# Altium PCB mainPCB.PcbDoc
Units mil, origin at the board's own origin, x right, y up, seen from the top; angles counter-clockwise.
Board outline 2095 x 3365 mil, 4 copper layers (Top Layer, GND, 3V3, Bottom Layer), stack 23.756 mil thick; 52 components, 47 nets, 212 pads, 97 vias.
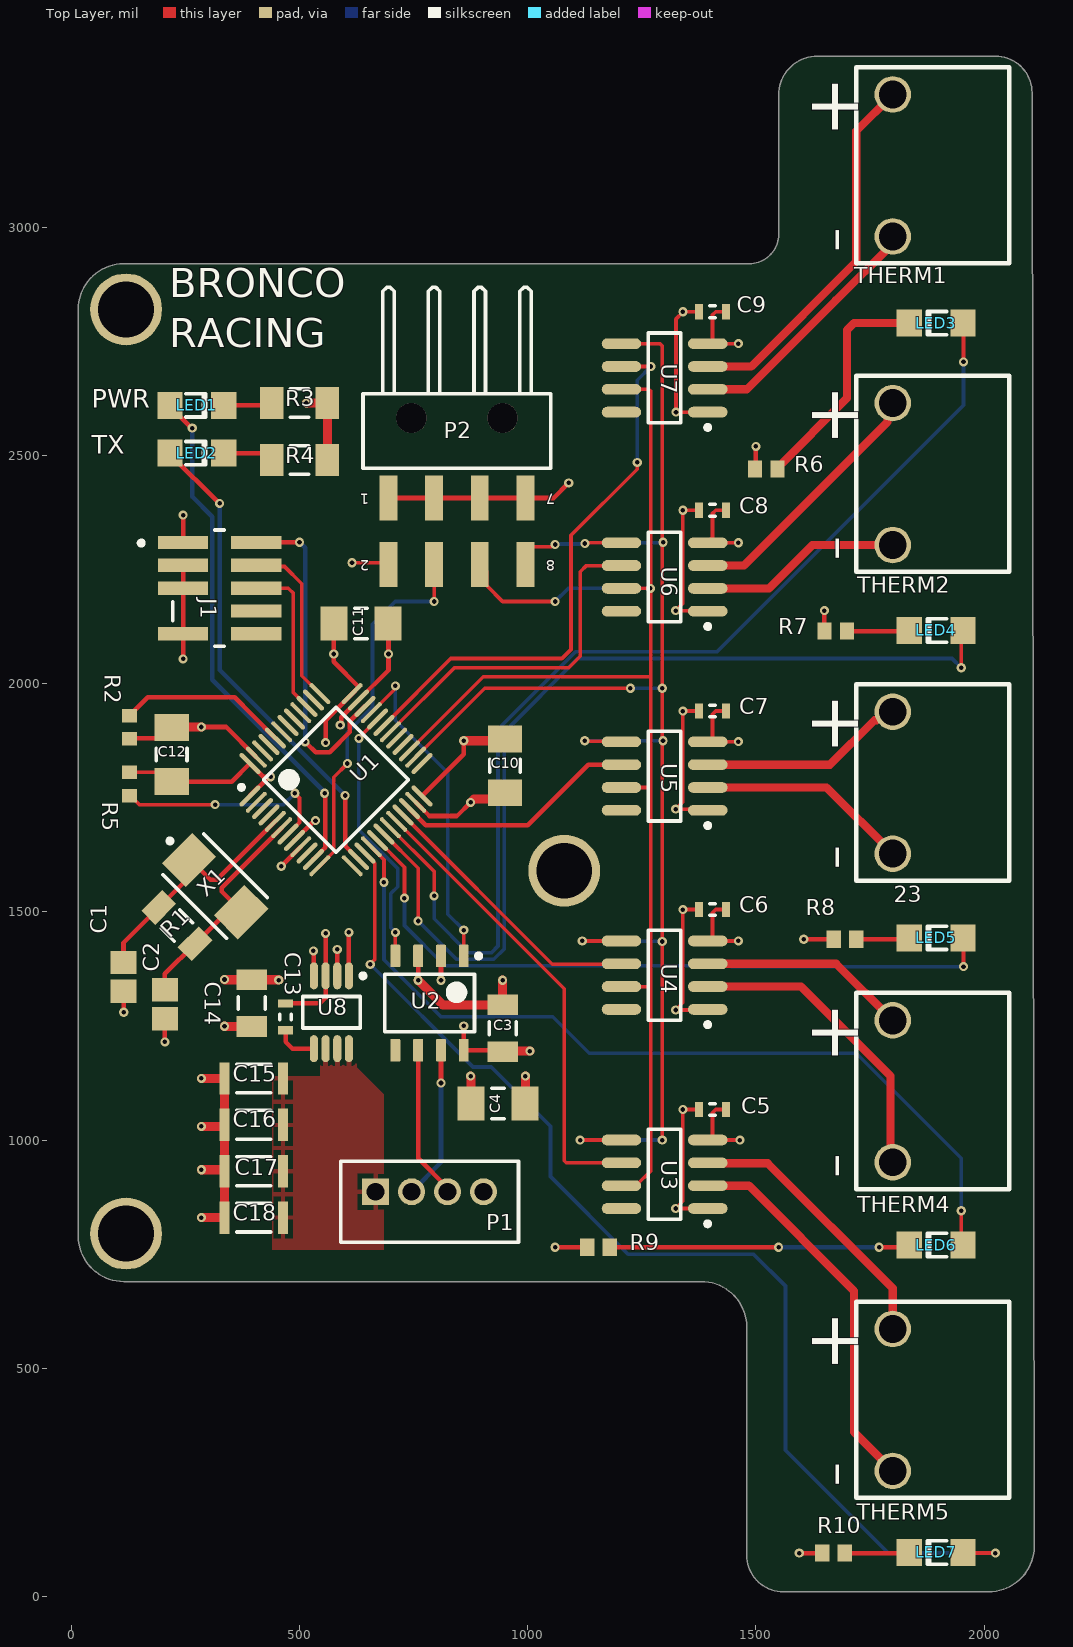
[diagram p0: Top Layer view]
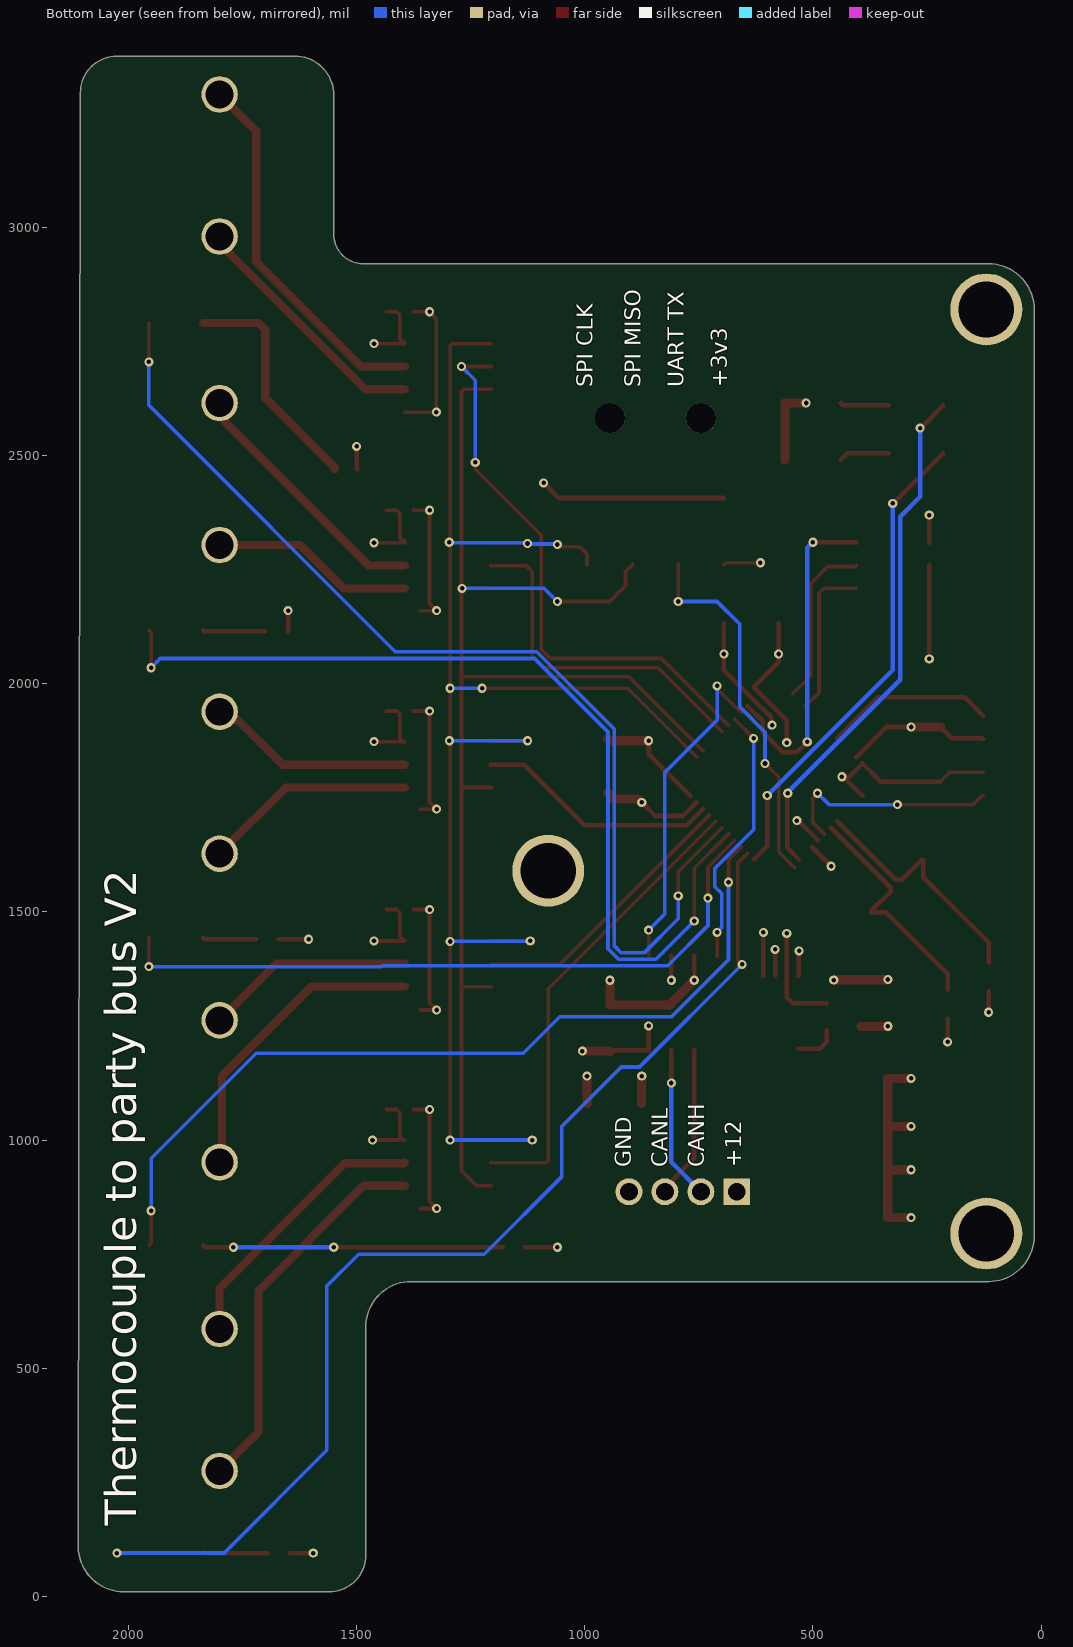
[diagram p1: Bottom Layer view, seen from below]
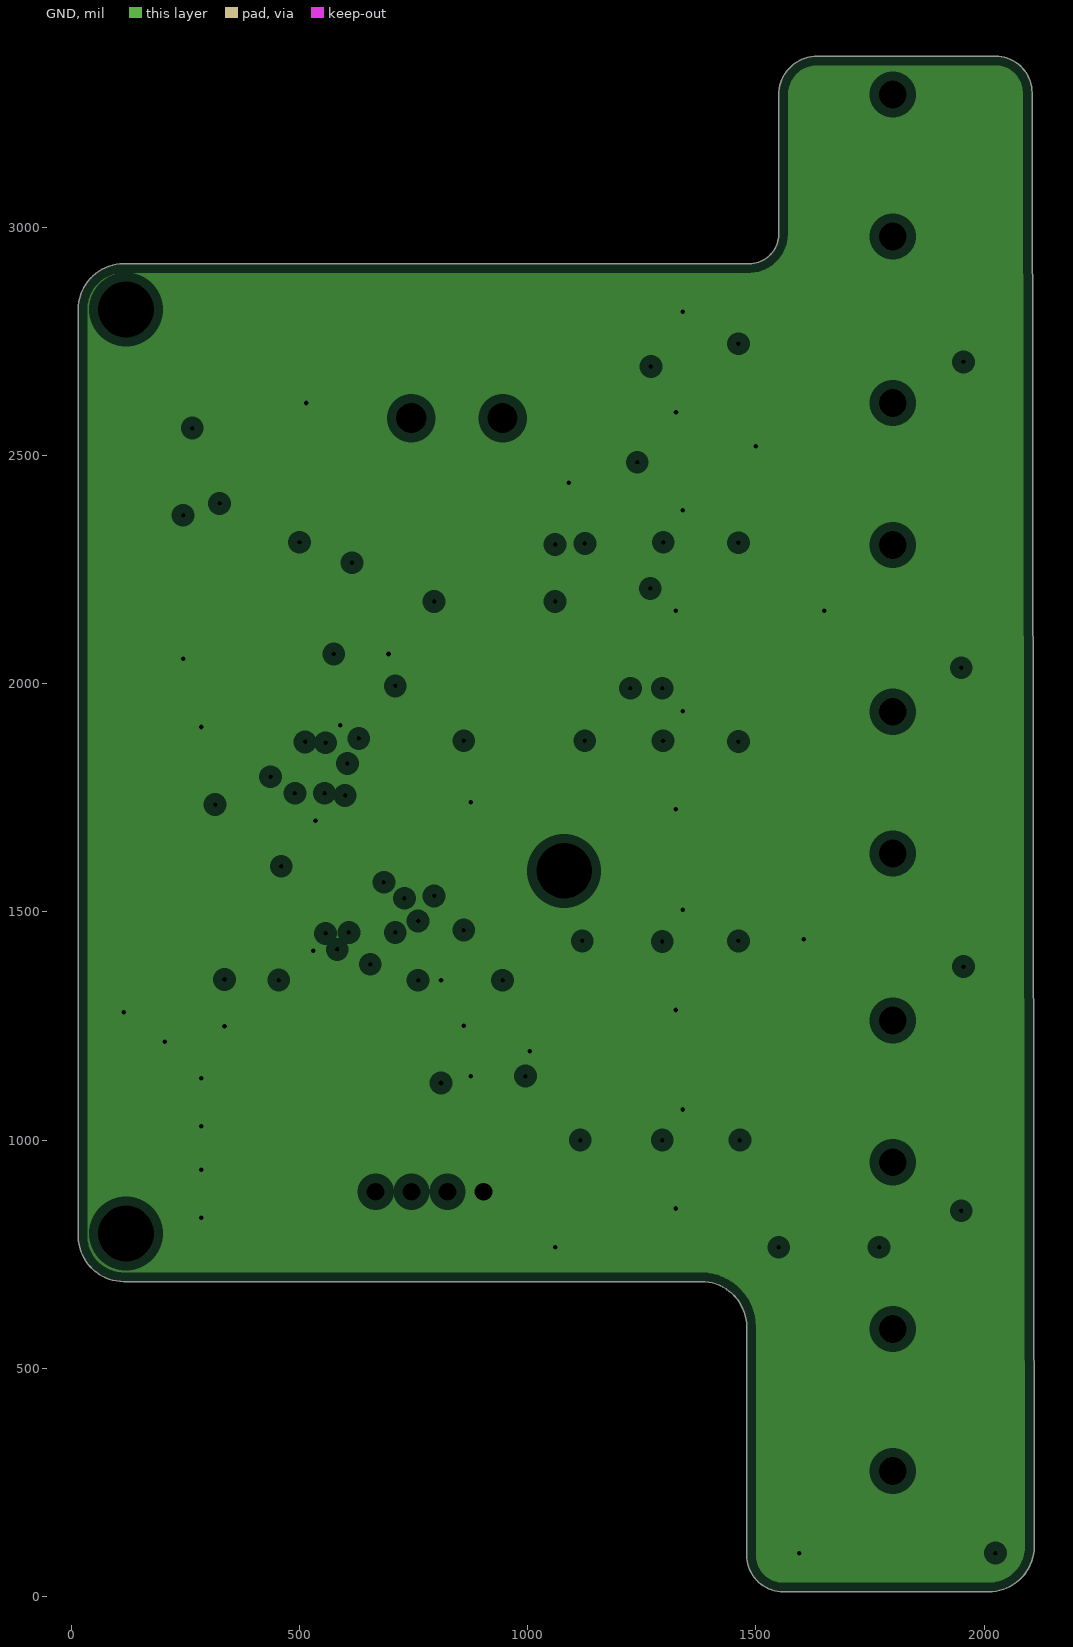
[diagram p2: GND, clearances drawn from the general rule]
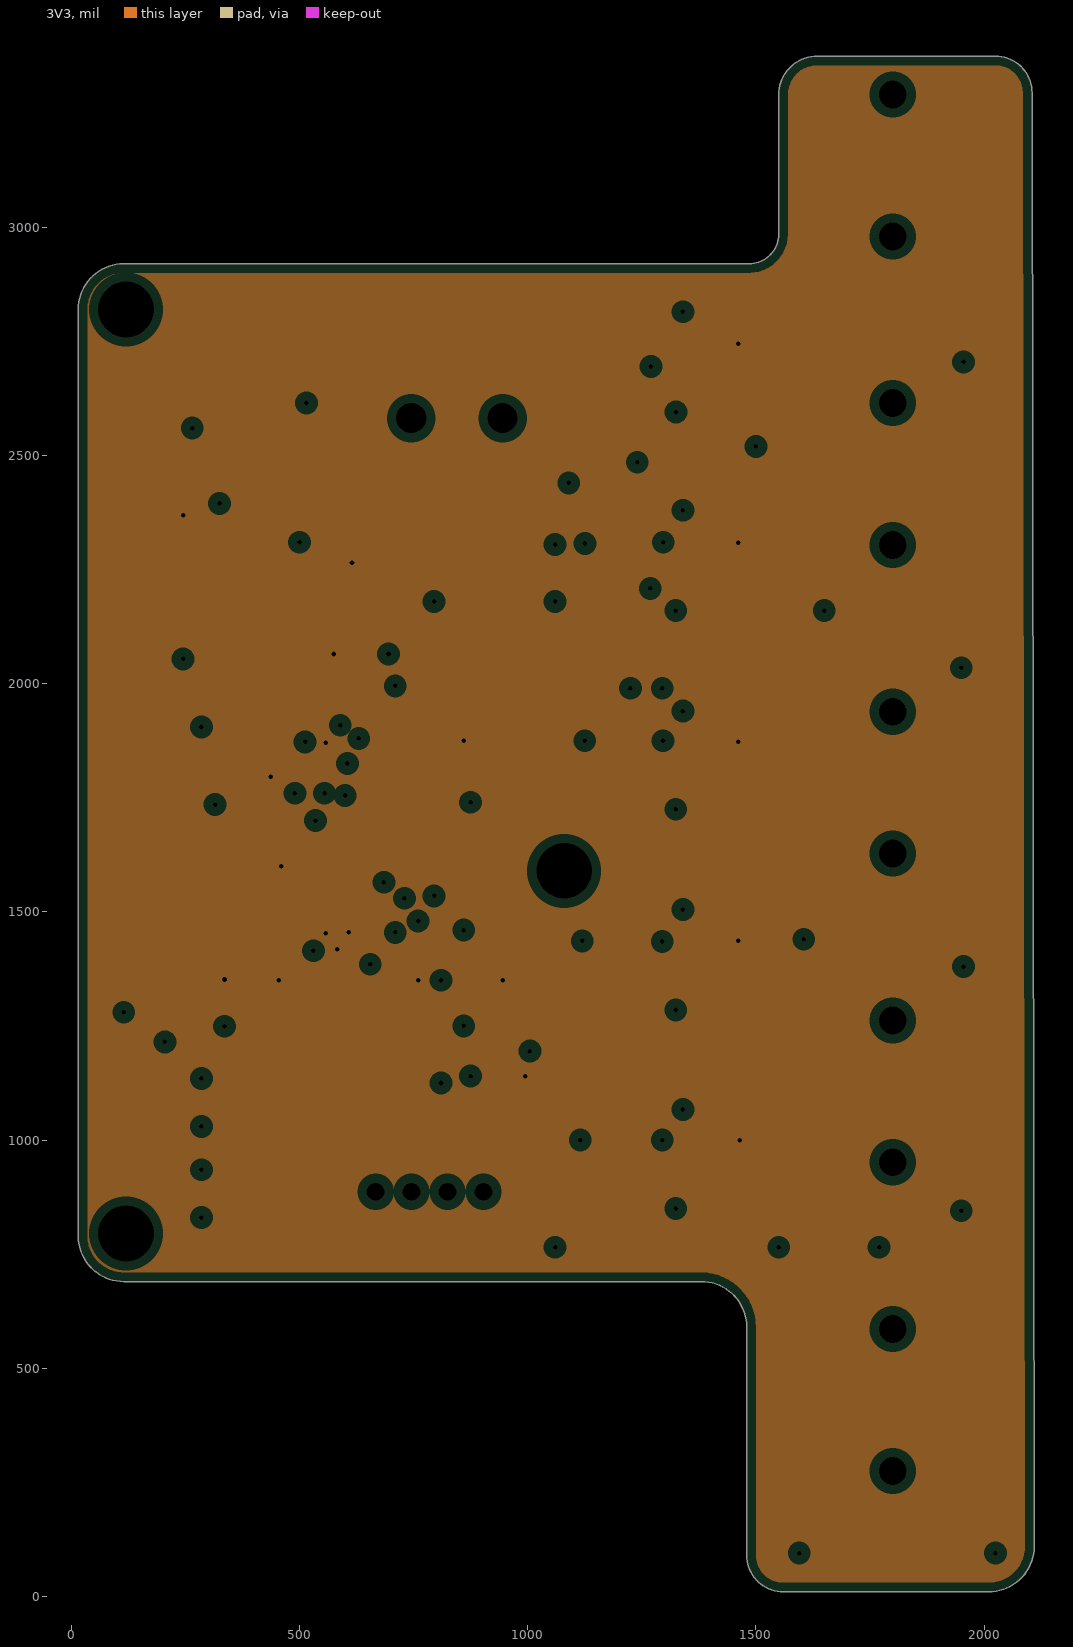
[diagram p3: 3V3, clearances drawn from the general rule]

## Layer stack, top to bottom
Top Solder: solder mask 0.4, Solder Resist, Dk 3.5
Top Layer: signal copper 1.4
Dielectric 2: prepreg 2.8, PP-006, Dk 4.1
GND: plane copper 1.378, net GND
Dielectric 1: dielectric 12.6, FR-4, Dk 4.8
3V3: plane copper 1.378, net 3V3
Dielectric 3: prepreg 2.8, PP-006, Dk 4.1
Bottom Layer: signal copper 1.4
Bottom Solder: solder mask 0.4, Solder Resist, Dk 3.5

## Board outline
1380,690 cw(c1380,590) 1480,590 1480,90 ccw(c1560,90) 1560,10 2010,10 ccw(c2010,110) 2110,110 2109.84,120 2105.12,3295 ccw(c2025.12,3295) 2025.12,3375 2000,3375 1635,3375 ccw(c1635,3290) 1550,3290 1550,2985 cw(c1485,2985) 1485,2920 1445,2920 115,2920 ccw(c115,2820) 15,2820 15,790 ccw(c115,790) 115,690

## Design rules (kind name [scope] priority, off if disabled: settings)
Clearance [All] p1: gap=10 ignorepadtopadclearanceinfootprint=TRUE except(0: SMDPad-Hole THPad-Hole Via-Hole Fill-Hole Poly-Hole Region-Hole Text-Hole; 6: Arc-Arc Arc-Track Arc-SMDPad Arc-THPad Arc-Via Arc-Fill Arc-Poly Arc-Region Arc-Text Arc-Hole Track-Track Track-SMDPad Track-THPad Track-Via Track-Fill Track-Poly Track-Region Track-Text Track-Hole)
PlaneClearance [All] p1: clearance=20
PlaneConnect [All] p1: planeconnectstyle=Relief reliefexpansion=20 reliefentries=4 reliefconductorwidth=10 reliefairgap=10
PolygonConnect [All] p1: connectstyle=Relief reliefconductorwidth=10 reliefentries=4 polygonreliefangle="90 Angle" airgapwidth=10
RoutingVias [All] p1: holewidth=10 width=20 viastyle="Through Hole" minholewidth=10 minwidth=20 maxholewidth=196.85 maxwidth=236.22
SilkToSilkClearance [All] p1 off: silktosilkclearance=10
SolderMaskExpansion [All] p1: expansion=4 istentingtop=FALSE
Width [All] p1: maxlimit=100 minlimit=6 preferedwidth=10 minimp=50.000000 maximp=50.000000 favimp=50.000000
27 further rules are at their usual default settings.

## Components (designator, comment, footprint, x,y, rotation, side; value= is the part's Value field where it differs from the comment)
23 "AM-K-PCB" "Type K Connector" 1800,1938.52 r270 top (schematic designator THERM3)
C1 "08051A200JAT2A" CAPC2013X140X50NL20T25 114.28,1357.42 r90 top
C2 "08051A200JAT2A" CAPC2013X140X50NL20T25 205,1297.42 r90 top
C3 "GRM31MR71H105KA88L" CAPC3216X125X55LL15T25 945,1245 r270 top
C4 "12065C104KAT2A" CAPC3216X94X50ML20T25 935,1080 r180 top
C5 "CGA3E2X7R1H104K080AA" CAPC1608X90X20LL10 1405,1066.9 r180 top
C6 "CGA3E2X7R1H104K080AA" CAPC1608X90X20LL10 1405,1505 r180 top
C7 "CGA3E2X7R1H104K080AA" CAPC1608X90X20LL10 1405,1940 r180 top
C8 "CGA3E2X7R1H104K080AA" CAPC1608X90X20LL10 1405,2380 r180 top
C9 "CGA3E2X7R1H104K080AA" CAPC1608X90X20LL10 1405,2815 r180 top
C10 "12065C104KAT2A" CAPC3216X94X50ML20T25 950,1820 r270 top
C11 "12065C104KAT2A" CAPC3216X94X50ML20T25 635,2131.82 r0 top
C12 "12065C104KAT2A" CAPC3216X94X50ML20T25 220,1845 r90 top
C13 "CGA3E2X7R1H104K080AA" CAPC1608X90X20LL10 469.44,1270 r270 top
C14 "GRM31MR71H105KA88L" CAPC3216X125X55LL15T25 395,1300 r270 top
C15 "CGA5L3X5R1H106K160AB" CAPC3216X190X20LL20 400,1135 r180 top
C16 "CGA5L3X5R1H106K160AB" CAPC3216X190X20LL20 400,830 r180 top
C17 "CGA5L3X5R1H106K160AB" CAPC3216X190X20LL20 400,1033.33 r180 top
C18 "CGA5L3X5R1H106K160AB" CAPC3216X190X20LL20 400,931.67 r180 top
J1 "FTSH-105-01-L-DV-007-K" FP-FTSH-105-01-L-DV-007-K-MFG 325,2209.18 r270 top
LED1 "150120GS75000" 1206_A 275,2610 r180 top
LED2 "150120GS75000" 1206_A 275,2505 r180 top
LED3 "150120GS75000" 1206_A 1895,2790 r0 top
LED4 "150120GS75000" 1206_A 1895,2116.6 r0 top
LED5 "150120GS75000" 1206_A 1895,1443.19 r0 top
LED6 "150120GS75000" 1206_A 1895,769.79 r0 top
LED7 "150120GS75000" 1206_A 1895,96.38 r0 top
P1 "B4B-PH-K-S(LF)(SN)" JST-B4B-PH-K-S_V 785,865 r0 top
P2 "610108249121" 610108249121 845,2553.28 r180 top
R1 "ERJ-8ENF1004V" RESC3216X70X50NL05T20 231.53,1470 r315 top
R2 "ERJ3EKF1002V" RESC1609X55X30LL15T15 127.31,1904.41 r270 top
R3 "CRCW1206200RFKEA" RESC3216X60X45ML10T20 500,2615 r180 top
R4 "CRCW1206200RFKEA" RESC3216X60X45ML10T20 500,2490 r180 top
R5 "ERJ3EKF1002V" RESC1609X55X30LL15T15 127.31,1780 r90 top
R6 "CRCW0603200RFKEA" RESC1609X50X30NL10T20 1522.82,2470 r180 top
R7 "CRCW0603200RFKEA" RESC1609X50X30NL10T20 1675,2115 r180 top
R8 "CRCW0603200RFKEA" RESC1609X50X30NL10T20 1695,1440 r180 top
R9 "CRCW0603200RFKEA" RESC1609X50X30NL10T20 1155,765 r180 top
R10 "CRCW0603200RFKEA" RESC1609X50X30NL10T20 1670,95 r180 top
THERM1 "AM-K-PCB" "Type K Connector" 1800,3291.02 r270 top
THERM2 "AM-K-PCB" "Type K Connector" 1800,2614.77 r270 top
THERM4 "AM-K-PCB" "Type K Connector" 1800,1262.27 r270 top
THERM5 "AM-K-PCB" "Type K Connector" 1800,586.02 r270 top
U1 "STM32F103C8T6" STM-LQFP48_L 580,1789.53 r45 top
U2 "SN65HVD230DR" D0008A_L 785,1300 r270 top
U3 "MAX31855KASA+T" MAXM-S8+4_N 1300,925 r180 top
U4 "MAX31855KASA+T" MAXM-S8+4_N 1300,1361.25 r180 top
U5 "MAX31855KASA+T" MAXM-S8+4_N 1300,1797.5 r180 top
U6 "MAX31855KASA+T" MAXM-S8+4_N 1300,2233.75 r180 top
U7 "MAX31855KASA+T" MAXM-S8+4_N 1300,2670 r180 top
U8 "ADP3335ARMZ-3.3RL7" ADI-RM-8_L 570,1280 r270 top
X1 "ABM3-8.000MHZ-D2Y-T" ABRA-ABM3-2_V 315,1556.5 r315 top

## Footprints (in the part's own frame and the unit in brackets; to place one, negate y for a bottom-side part, rotate by r counter-clockwise, add the part's x,y. Pads: shape width x height; smd on the part's side, far side on the other; paste and mask are expansions set on the pad)
1206_A [mm] "Chip LED, 2-Leads, Body 3.2x1.6mm, IPC Medium Density"
  rect 1.4x1.5 smd: 1(-1.5,0) 2(1.5,0)
  silkscreen extent -0.5,-0.67 0.6,0.65, body extent -1.6,-0.8 1.6,0.8, height 0.68
610108249121 [mm] "Pin Header, pitch 2.54 mm, SMD, Angled, dual row, 8p"
  rect 1x2.5 smd: 1(3.81,3.72) 2(3.81,7.42) 3(1.27,3.72) 4(1.27,7.42) 5(-1.27,3.72) 6(-1.27,7.42) 7(-3.81,3.72) 8(-3.81,7.42)
  round 1.68 hole 1.68 unplated: MH1(2.54,-0.73) MH2(-2.54,-0.73)
  silkscreen extent -5.23,-8 5.23,2.07, body extent -5.08,-8 5.08,8.16, height 5.1
ABRA-ABM3-2_V [mm] "SMD, 2-Leads, Body 5x3.2mm, Pitch 4.1mm"
  rect 1.9x2.4 smd: 1(-2.05,0) 2(2.05,0)
  silkscreen extent -3.67,-1.6 2.5,1.6, body extent -2.5,-1.6 2.5,1.6, height 1.3
ADI-RM-8_L [mm] "SOP, 8-Leads, Body 3x3mm, Pitch 0.65mm, IPC High Density"
  oval 1.5x0.45 smd: 1(-2.025,0.975) 2(-2.025,0.325) 3(-2.025,-0.325) 4(-2.025,-0.975) 5(2.025,-0.975) 6(2.025,-0.325) 7(2.025,0.325) 8(2.025,0.975)
  silkscreen extent -2.15,-1.6 0.87,1.88, body extent -1.6,-1.6 1.6,1.6, height 1.1
CAPC1608X90X20LL10 [mm] "Chip Capacitor, 2-Leads, Body 1.70x0.90mm, IPC High Density"
  rect 0.45x0.85 smd: 1(-0.75,0) 2(0.75,0)
  silkscreen extent -0.15,-0.33 0.15,0.33, body extent -0.85,-0.45 0.85,0.45, height 0.9
CAPC2013X140X50NL20T25 [mm] "Chip Capacitor, 2-Leads, Body 2.00x1.25mm, IPC Medium Density"
  rect 1.3x1.45 smd: 1(-0.8,0) 2(0.8,0)
  body extent -1.1,-0.72 1.1,0.72, height 1.4
CAPC3216X94X50ML20T25 [mm] "Chip Capacitor, 2-Leads, Body 3.20x1.60mm, IPC Low Density"
  rect 1.5x1.9 smd: 1(-1.5,0) 2(1.5,0)
  silkscreen extent -0.35,-0.85 0.35,0.85, body extent -1.7,-0.9 1.7,0.9, height 0.94
CAPC3216X125X55LL15T25 [mm] "Chip Capacitor, 2-Leads, Body 3.20x1.60mm, IPC High Density"
  rect 1.15x1.7 smd: 1(-1.3,0) 2(1.3,0)
  silkscreen extent -0.35,-0.75 0.35,0.75, body extent -1.68,-0.87 1.68,0.88, height 1.25
CAPC3216X190X20LL20 [mm] "Chip Capacitor, 2-Leads, Body 3.5x1.9mm, IPC High Density"
  rect 0.55x1.8 smd: 1(-1.625,0) 2(1.625,0)
  silkscreen extent -0.95,-0.8 0.95,0.8, body extent -1.75,-0.95 1.75,0.95, height 1.9
D0008A_L [mm] "SOIC, 8-Leads, Body 5x4mm, Pitch 1.27mm, IPC High Density"
  rrect18% 1.25x0.55 smd: 1(-2.625,1.905) 2(-2.625,0.635) 3(-2.625,-0.635) 4(-2.625,-1.905) 5(2.625,-1.905) 6(2.625,-0.635) 7(2.625,0.635) 8(2.625,1.905)
  silkscreen extent -2.75,-2.5 1.6,2.86, body extent -3,-2.45 3,2.45, height 1.63
FP-FTSH-105-01-L-DV-007-K-MFG [mm]
  rect 0.74x2.79 smd paste+0 mask+0: 1(-2.54,-2.035) 2(-2.54,2.035) 3(-1.27,-2.035) 4(-1.27,2.035) 5(0,-2.035) 6(0,2.035) 8(1.27,2.035) 9(2.54,-2.035) 10(2.54,2.035)
  silkscreen extent -3.24,-4.49 3.24,0.27, body extent -3.34,-3.53 3.34,3.53, height 0.25
JST-B4B-PH-K-S_V [mm] "Connector, 4-Leads, Body 9.9x4.5mm, Pitch 2mm"
  rect 1.5x1.5 hole 1: 1(-3,0.55)
  round 1.5 hole 1: 2(-1,0.55) 3(1,0.55) 4(3,0.55)
  silkscreen extent -4.95,-2.25 4.95,2.25, body extent -4.95,-2.25 4.95,2.25, height 6
MAXM-S8+4_N [mm] "SOIC, 8-Leads, Body 4.9x3.9mm, Pitch 1.27mm, IPC Medium Density"
  oval 2.2x0.6 smd: 1(-2.4,1.905) 2(-2.4,0.635) 3(-2.4,-0.635) 4(-2.4,-1.905) 5(2.4,-1.905) 6(2.4,-0.635) 7(2.4,0.635) 8(2.4,1.905)
  silkscreen extent -2.53,-2.5 0.9,2.88, body extent -2,-2.5 2,2.5, height 1.75
RESC1609X50X30NL10T20 [mm] "Chip Resistor, 2-Leads, Body 1.55x0.85mm, IPC Medium Density"
  rect 0.8x0.95 smd: 1(-0.625,0) 2(0.625,0)
  body extent -0.82,-0.48 0.82,0.48, height 0.5
RESC1609X55X30LL15T15 [mm] "Chip Resistor, 2-Leads, Body 1.75x0.95mm, IPC High Density"
  rect 0.75x0.85 smd: 1(-0.65,0) 2(0.65,0)
  body extent -0.87,-0.48 0.87,0.48, height 0.55
RESC3216X60X45ML10T20 [mm] "Chip Resistor, 2-Leads, Body 3.20x1.60mm, IPC Low Density"
  rect 1.3x1.8 smd: 1(-1.55,0) 2(1.55,0)
  silkscreen extent -0.5,-0.8 0.5,0.8, body extent -1.65,-0.85 1.65,0.85, height 0.6
RESC3216X70X50NL05T20 [mm] "Chip Resistor, 2-Leads, Body 3.20x1.60mm, IPC Medium Density"
  rect 1.1x1.65 smd: 1(-1.425,0) 2(1.425,0)
  silkscreen extent -0.5,-0.73 0.5,0.73, body extent -1.63,-0.82 1.62,0.82, height 0.7
STM-LQFP48_L [mm] "QFP, 48-Leads, Body 7x7mm, Pitch 0.5mm, IPC High Density"
  oval 1.55x0.25 smd: 1(-4.025,2.75) 2(-4.025,2.25) 3(-4.025,1.75) 4(-4.025,1.25) 5(-4.025,0.75) 6(-4.025,0.25) 7(-4.025,-0.25) 8(-4.025,-0.75) 9(-4.025,-1.25) 10(-4.025,-1.75) 11(-4.025,-2.25) 12(-4.025,-2.75) 25(4.025,-2.75) 26(4.025,-2.25) 27(4.025,-1.75) 28(4.025,-1.25) 29(4.025,-0.75) 30(4.025,-0.25) 31(4.025,0.25) 32(4.025,0.75) 33(4.025,1.25) 34(4.025,1.75) 35(4.025,2.25) 36(4.025,2.75)
  oval 0.25x1.55 smd: 13(-2.75,-4.025) 14(-2.25,-4.025) 15(-1.75,-4.025) 16(-1.25,-4.025) 17(-0.75,-4.025) 18(-0.25,-4.025) 19(0.25,-4.025) 20(0.75,-4.025) 21(1.25,-4.025) 22(1.75,-4.025) 23(2.25,-4.025) 24(2.75,-4.025) 37(2.75,4.025) 38(2.25,4.025) 39(1.75,4.025) 40(1.25,4.025) 41(0.75,4.025) 42(0.25,4.025) 43(-0.25,4.025) 44(-0.75,4.025) 45(-1.25,4.025) 46(-1.75,4.025) 47(-2.25,4.025) 48(-2.75,4.025)
  silkscreen extent -4.15,-2.85 2.85,3.55, body extent -3.5,-3.5 3.5,3.5, height 1.6
"Type K Connector" [mil]
  round 80 hole 61.02: 1(0,0) 2(311.02,0)
  silkscreen extent -60,-80 370,255

## Part data
23 THERM1 THERM2 THERM4 THERM5: library part "Type K Thermocoulple Conn."
C1 C2: library part CMP-2007-04537-1, Manufacturer="AVX Interconnect / Elco", Part Number=08051A200JAT2A
C3 C14: library part CMP-2000-06356-1, "Chip Capacitor, 1 uF, +/- 10%, 50 V, -55 to 125 degC, 1206 (3216 Metric), RoHS, Tape and Reel", Capacitance=1uF, Case Code - in=1206, Case Code - mm=3216, Case Height=1.15mm, Case Length=3.2mm, Case Width=1.6mm, Dielectric=X7R, Manufacturer=Murata, Maximum Operating Temperature=+125C, Minimum Operating Temperature=-55C, Package / Case=1206(3216metric), Package Description="2-Pin Surface Mount Device, Body 3.2 x 1.6 mm", Tolerance=10%, Voltage Rating DC=50V, Brand=MurataElectronics, Datasheet URL=http://search.murata.co.jp/Ceramy/image/img/A01X/G101/ENG/GRM31MR71H105KA88-01.pdf, Datasheet Version=03/2016, Factory Pack Quantity=3000, Manufacturer URL=http://www.murata.com/, Mounting Technology=SurfaceMount, Package Reference=1206, Packaging=Reel, Product=GeneralTypeMLCCs, Product Category=MultilayerCeramicCapacitorsMLCC-SMD/SMT, RoHS=Details, Series=GRM, Termination Style=SMD/SMT, Type=GeneralPurposeMLCC
C4 C10 C11 C12: library part CMP-2000-05018-1, "Chip Capacitor, Ceramic, 100 nF, 10%, 50 V, 1206, RoHS, Tape and Reel", Capacitance=100nF, Case Size/Dimension=1206, Dielectric=X7R, Manufacturer=AVX, Rated Voltage=50V, Tolerance (%)=±10%, Datasheet URL=http://www.mouser.com/ds/2/40/cauto-360.pdf, Datasheet Version=Sep-14, Manufacturer URL=http://www.avx.com/
C5 C6 C7 C8 C9 C13: library part CMP-2000-07546-1, "Chip Capacitor, 0.1 uF, +/- 10%, 50 V, -55 to 125 degC, 0603 (1608 Metric), RoHS, Tape and Reel", Capacitance=100nF, Case Code (Imperial)=0603, Case Code (Metric)=1608, Dielectric=X7R, Manufacturer=TDK, Max Operating Temperature=125degC, Min Operating Temperature=-55degC, Package Description="2-Pin Surface Mount Device, Body 1.6 x 0.8 mm", Package Quantity=1, Package Reference=603, Tolerance=10%, Voltage=50V, Case/Package=0603, Composition=Ceramic, Datasheet URL=https://product.tdk.com/info/en/catalog/datasheets/mlcc_automotive_general_en.pdf, Datasheet Version=12/2014, Depth=0.8mm, Height=0.8mm, Lead Free=LeadFree, Length=1.6mm, Manufacturer URL=http://www.tdk.com/, Mount=SurfaceMount, Mounting Technology=SurfaceMount, Packaging=TapeandReel, Radiation Hardening=No, REACH SVHC=NoSVHC, RoHSCompliant=True, Termination=SMD/SMT, Thickness=0.035inch, Voltage Rating=50V, Voltage Rating (DC)=50V, Weight=7.1E-05oz, Width=0.8mm
C15 C16 C17 C18: library part CMP-2000-07597-1, "Chip Capacitor, 10 uF, +/- 10%, 50 V, -55 to 85 degC, 1206 (3216 Metric), RoHS, Tape and Reel", Capacitance=10uF, Case Code (Imperial)=1206, Case Code (Metric)=3216, Dielectric=X5R, Manufacturer=TDK, Max Operating Temperature=85degC, Min Operating Temperature=-55degC, Package Description="2-Pin Surface Mount Device, Body 3.2 x 1.6 mm", Package Quantity=1, Tolerance=10%, Voltage Rating=50V, Case/Package=1206, Composition=Ceramic, Datasheet URL=https://product.tdk.com/info/en/documents/chara_sheet/CGA5L3X5R1H106K160AB.pdf, Datasheet Version=01/2016, Depth=1.6mm, Height=1.6mm, Lead Free=LeadFree, Length=3.2mm, Manufacturer URL=http://www.tdk.com/, Mount=SurfaceMount, Mounting Technology=SurfaceMount, Package Reference=1206, Packaging=TapeandReel, Radiation Hardening=No, REACH SVHC=NoSVHC, RoHSCompliant=True, Termination=SMD/SMT, Thickness=0.063inch, Voltage Rating (DC)=50V, Weight=0.000571oz, Width=1.6mm
J1: library part CMP-02766-000093-1, "CONN HEADER SMD 10POS 1.27MM", Current Rating=3.4A, Manufacturer=Samtec, Package=0, Temperature="-55°C to +125°C", Temperature Range High=+125°C, Temperature Range Low=-55°C, Automotive=No, Category=Conn, ComponentLink2Description=Datasheet, ComponentLink2URL=http://suddendocs.samtec.com/catalog_english/ftsh_smt.pdf, Conn Gender=Male, Conn Orientation=Vertical, Contact Material=Gold,Nickel, Device Class L1=Connectors, Device Class L2="Headers and Wire Housings", Device Class L3=unset, Digikey Description="CONN HEADER SMD 10POS 1.27MM", Footprint Url=http://suddendocs.samtec.com/prints/ftsh-1xx-xx-xxx-dv-xxx-footprint.pdf, Height=6.38mm, Lead Free=Yes, Manufacturer Part Number=FTSH-105-01-L-DV-007-K, Mouser Description="Conn Unshrouded Header HDR 10 POS 1.27mm Solder ST SMD Tube", Number Of Contacts=9, Number Of Rows=2, Octopart=https://octopart.com/ftsh-105-01-l-dv-007-k-samtec-53647300, Pitch=1.27mm, RoHS=TRUE, Standoff Height=0.2mm
LED1 LED2 LED3 LED4 LED5 LED6 LED7: library part CMP-1426-00014-1, "SMD mono-color Chip LED, WL-SMCW, Green", Color=Green, Manufacturer="Wuerth Elektronik", ComponentLink1Description="Manufacturer URL", ComponentLink1URL=http://www.we-online.com, ComponentLink2Description=Datasheet, ComponentLink2URL=http://katalog.we-online.com/led/datasheet/150120GS75000.pdf, PackageReference=1206_A, PartNumber=150120GS75000
P1: library part CMP-2000-05165-1, "Male Header, Pitch 2 mm, 1 x 4 Position, Height 6 mm, Tail Length 3.4 mm, -25 to 85 degC, RoHS, Bulk", Manufacturer=JST, Datasheet URL=http://datasheet.octopart.com/B4B-PH-K-S%28LF%29%28SN%29-JST-datasheet-10558886.pdf, Datasheet Version=Apr-09, Manufacturer URL=http://www.jst.com/home2.html, No of Positions=4, Pitch=2mm, Style/Orientation=StraightHeader/Plug, Termination=Crimp, Type=ShroudedHeader
P2: library part CMP-1502-01147-1, "SMT Angled Pin Header WR-PHD, Pitch 2.54 mm, Dual Row, 8 pins", Contact Resistance=20mOhm, Manufacturer="Wurth Elektronik", Operating Temperature=-40to105degC, Rated Current=3A, Withstanding Voltage=600VAC, Working Voltage=250VAC, Datasheet URL=https://katalog.we-online.de/em/datasheet/6101xx249121.pdf, Gender=Male, Manufacturer URL=http://www.we-online.de, Mounting Technology=SMT, Orientation=Angled, Package Reference=610108249121, Packaging=TapeandReel, Part Number=610108249121, Pin Number=8, Pitch=2.54mm, Publisher=WurthElektronik, Row Number=Dual
R1: library part CMP-2003-00020-1, Manufacturer=Panasonic, Part Number=ERJ-8ENF1004V
R2 R5: library part CMP-2000-07452-1, "Chip Resistor, 10 KOhm, +/- 1%, 0.1 W, -55 to 155 degC, 0603 (1608 Metric), RoHS, Tape and Reel", Case Code (Imperial)=0603, Case Code (Metric)=1608, Manufacturer=Panasonic, Max Operating Temperature=155degC, Max Power Dissipation=100mW, Min Operating Temperature=-55degC, Package Description="2-Pin Surface Mount Device, Body 1.6 x 0.85 mm", Package Quantity=1, Package Reference=603, Resistance=10KOhm, Temperature Coefficient=100ppm\/degreesC, Tolerance=1%, Voltage Rating=75V, Case\/Package=0603, Composition=ThickFilm, Contact Plating=Tin, Datasheet URL=https://industrial.panasonic.com/cdbs/www-data/pdf/RDA0000/AOA0000C304.pdf, Datasheet Version=02/2017, Depth=0.8mm, Height=0.45mm, Lead Free=LeadFree, Length=1.6mm, Manufacturer URL=http://www.panasonic.com/, Military Standard=Not, Mount=SurfaceMount, Mounting Technology=SurfaceMount, Number of Pins=2, Number of Terminations=2, Packaging=TapeandReel, Power Rating=100mW, Radiation Hardening=No, REACH SVHC=NoSVHC, RoHSCompliant=true, Termination=SMD/SMT, Voltage Rating (DC)=75V, Width=0.031inch
R3 R4: library part CMP-2003-01935-1, Manufacturer="Vishay Dale", Part Number=CRCW1206200RFKEA
R6 R7 R8 R9 R10: library part CMP-2000-03062-1, Manufacturer="Vishay Dale", Part Number=CRCW0603200RFKEA
U1: library part CMP-0237-00215-3, "ARM Cortex-M3 32-bit MCU, 64 KB Flash, 20 KB Internal RAM, 37 I/Os, 48-pin LQFP, -40 to 85 degC, Tray", I/Os (High Current)=37, Operating Frequency(F) (Processor speed) (MHz)=72, Supply Voltage(Vcc) min (V)=2, A/D Converter="2x12-bit (10 Channel)", ComponentLink1Description="Manufacturer URL", ComponentLink1URL=http://www.st.com/web/en/home.html, ComponentLink2Description=Datasheet, ComponentLink2URL=http://www.st.com/st-web-ui/static/active/en/resource/technical/document/datasheet/CD00161566.pdf, ComponentLink3Description="Package Specification", ComponentLink3URL=http://www.st.com/st-web-ui/static/active/en/resource/technical/document/datasheet/DM00058181.pdf, Core="ARM Cortex-M3", DatasheetVersion="Rev. 16", FLASH Size (Prog) (kB)=64, Internal RAM Size (kB)=20, Mounting Technology="Surface Mount", PackageDescription="48-Pin Low Profile Quad Flat Package, 7 x 7 mm Body, 0.5 mm Pitch", PackageReference=LQFP48, PackageVersion="Rev. 6, 06/2013", Packing=Tray, PartNumber=STM32F103C8T6
U2: library part CMP-0315-00015-2, "3.3V CAN Transceiver with Standby Mode, 17 mA, -40 to 85 degC, 8-pin SOIC (D), Green (RoHS & no Sb/Br)", Drivers Per Package=1, Low Power Mode=Standby, Manufacturer="Texas Instruments", Rating=Catalog, Supply Voltage(s)(V)=3.3, Code_JEDEC=MS-012AA, ComponentLink1Description=Datasheet, ComponentLink1URL=http://www.ti.com/general/docs/lit/getliterature.tsp?genericPartNumber=SN65HVD230&fileType=pdf, DatasheetVersion=SLOS346K, Eco-Plan="Green (RoHS & no Sb/Br)", ICC(Max)(mA)=17, Isolated=No, Mounting Technology="Surface Mount", PackageDescription="8-Pin Plastic Small Outline Integrated Circuit, 4.9 x 3.9 mm, Pitch 1.27 mm Pitch", PackageReference=D0008A, PackageVersion="revM, Jun-2011", PartNumber=SN65HVD230DR, Receivers Per Package=1, SubFamily=CAN, Transient Pulse Protection(V)="-25 to 25"
U3 U4 U5 U6 U7: library part CMP-0253-00398-1, "Cold Junction Compensated Thermocouple to Digital Converter, 14 Bits Temperature Resolution, -40 to 125 degC, 8-Pin SOIC (S8+4), Pb-Free, Tape ang Reel", Generic Part Number=MAX31855, Code_JEDEC=MS-012, ComponentLink1Description="Manufacturer URL", ComponentLink1URL=http://www.maximintegrated.com/, ComponentLink2Description=Datasheet, ComponentLink2URL=http://datasheets.maximintegrated.com/en/ds/MAX31855.pdf, ComponentLink3Description="Package Specification", ComponentLink3URL=http://pdfserv.maximintegrated.com/package_dwgs/21-0041.PDF, DatasheetVersion="Rev. 2", Functions="Thermocouple-to-Digital Converter", Interface=SPI, Mounting Technology="Surface Mount", PackageDescription="8-Pin Small-Outline IC, Narrow, Body 3.9 x 4.9 mm, Pitch 1.27 mm", PackageReference=S8+4, PackageVersion="Rev. D, 10/2012", Packing="Tape ang Reel", Parasite Pwr.=No, PartNumber=MAX31855KASA+T
U8: library part CMP-0786-00245-1, "High Accuracy, Ultralow IQ, 500 mA, anyCAP Low Dropout Regulator, 2.6 to 12 V Vin, 3.3 V Vout, Industrial, 8-pin SOP (RM-8), Reel", Manufacturer="Analog Devices", Code_JEDEC=MO-187-AA, ComponentLink1Description="Manufacturer URL", ComponentLink1URL=http://www.analog.com/en/index.html, ComponentLink2Description=Datasheet, ComponentLink2URL=http://www.analog.com/static/imported-files/data_sheets/ADP3335.pdf, ComponentLink3Description="Package Specification", ComponentLink3URL=http://www.analog.com/static/imported-files/packages/PKG_PDF/MSOP%28RM%29/RM_8.pdf, ComponentLink4Description="URL Link1", ComponentLink4URL="Product URL:http://www.analog.com/en/ADP3335/productSearch.html", DatasheetVersion="Rev. C", Mounting Technology="Surface Mount", PackageDescription="8-Pin Mini Small Outline Package, Body 3 x 3 mm, Pitch 0.65 mm", PackageReference=RM-8, PackageVersion=Aug-05, Packing=Reel, PartNumber=ADP3335ARMZ-3.3RL7, Vin (max) (V)=12, Vin (min) (V)=2.6
X1: library part CMP-2000-05033-1, "Miniature Ceramic Crystal, 8 MHz, -40 to 85 degC, 2-Pin SMD, RoHS, Tape and Reel", Case Height=1.3mm, Case Length=5mm, Case Width=3.2mm, Frequency=8MHz, Frequency Stability=30PPM, Load Capacitance=18pF, Manufacturer=ABRACON, Operating Temperature Range=-40Cto+85C, Package / Case=5mmx3.2mm, Package Description="2-Pin Surface Mount Device, Body 5 x 3.2 mm", Package Reference=ABM3-2, Tolerance=20PPM, Brand=ABRACON, Datasheet URL=http://www.farnell.com/datasheets/1754353.pdf, Datasheet Version=Sep-13, Dimensions=3.2mmWx5mmLx1.3mmH, ESR=140Ohms, Factory Pack Quantity=1000, Manufacturer URL=http://www.abracon.com/, Mounting Style=SMD/SMT, Package URL=http://www.abracon.com/Support/PackageDrawing/Resonators/ABM3.PDF, Packaging=Reel, Product Category=Crystals, RoHS=Details, Series=ABM3, Termination Style=SMD/SMT, Type=MiniatureCeramicCrystal

## Free pads (board coordinates)
  round 157.48 hole 122.05: 5(120,795) 5(120,2820) 5(1080,1590)

## Via types
v1: diameter 20, hole 10, Top Layer to Bottom Layer, 97 vias

## Nets (pads, with @x,y where several pads share a name; then routed paths per layer and width w, separated by ;. In a path a pad name is that pad's centre, name@x,y a point inside that pad or via, vN(x,y) a via of type N, cw(c..) or ccw(c..) an arc to the next point about the centre after c; other vN are vias at no path point)
3V3: C3.1 C4.1 C5.1 C6.1 C7.1 C8.1 C9.1 C10.1 C11.1 C12.1 C13.1 C14.1 J1.1 P2.2 R5.2 U1.1 U1.9 U1.24 U1.36 U1.48 U2.3 U3.4 U4.4 U5.4 U6.4 U7.4 U8.1 U8.2 U8.3 | length 2888.8
  Top Layer w8: R5.2 200.35,1805.59 C12.1 ; v1(615,2265) 691.15,2265 P2.2 ; U3.4 U3.4@1397.78,1000 ; U4.4 v1(1461.7,1436.25) ; U4.4@1394.49,1438.1 1397.78,1438.1 1405,1445.32 1405,1498.1 1411.9,1505 C6.1 ; U5.4@1394.49,1873.1 U5.4@1397.78,1873.1 ; U6.4 v1(1461.7,2308.75) ; U6.4@1394.49,2313.1 1397.78,2313.1 1405,2320.32 1405,2373.1 1411.9,2380 C8.1 ; U7.4 v1(1461.7,2745) ; U7.4@1394.49,2748.1 1397.78,2748.1 1405,2755.32 1405,2808.1 1411.9,2815 C9.1 ; C5.1 1411.9,1066.9 1405,1060 1405,1007.22 U3.4@1397.78,1000 ; C7.1 1411.9,1940 1405,1933.1 1405,1880.32 U5.4@1397.78,1873.1 ; v1(1461.7,1873.1) U5.4@1397.78,1873.1 ; v1(1465,1000) U3.4@1397.78,1000
  Top Layer w10: C12.1 220.94,1785 351.37,1785 U1.48 420.45,1795.96 v1(436.62,1795.96) ; J1.1 244.88,2369.07 v1(245,2369.18) ; U1.1 431.41,1794.05 434.71,1794.05 v1(436.62,1795.96) ; v1@431.41,1795.96 v1(436.62,1795.96) ; v1(460,1600) U1.9 ; C13.1 544.53,1299.53 557.2,1312.2 U8.3 v1(557.2,1452.8) ; v1(557.23,1870.71) 557.23,1919.87 U1.36 630,1992.64 630,1992.75 575,2047.75 v1(575,2065) 575,2130.88 C11.1 ; U8.2 v1(582.8,1417.8) ; U8.1 v1(608.39,1455) ; v1(760,1350) U2.3 ; U1.24@768.88,1753.88 768.76,1753.88 U1.24 860,1845.43 v1(860,1875)
  Top Layer w20: v1(335.59,1351.77) 336.18,1351.18 453.82,1351.18 v1(454.41,1350.59) ; v1(760,1350) 813.82,1296.18 C3.1 v1(945,1350) ; v1(860,1875) 945.94,1875 C10.1 ; C4.1 995,1080.94 v1(995,1140)
+12: C15.1 C16.1 C17.1 C18.1 P1.1 U8.6 U8.7 U8.8
CANH: P1.2 U2.7 | length 336.7
  Top Layer w10: v1(810,1125) U2.7
  Bottom Layer w10: P1.2 810,951.02 v1(810,1125)
CANL: P1.3 U2.6 | length 336.7
  Top Layer w10: U2.6 760,960 824.37,895.63 P1.3
CANRXD: U1.32 U2.4 | length 581.7
  Top Layer w8: v1(630,1880) 630,1880.79 671.17,1921.96 U1.32 ; U2.4 v1(710,1455)
  Bottom Layer w8: v1(630,1880) 630,1680 715,1595 715,1555 700,1540 700,1465.69 710,1455.69 v1(710,1455)
CANTXD: U1.33 U2.1 | length 734.3
  Top Layer w8: U1.33 707.7,1986.83 707.7,1992.7 v1(710,1995) ; U2.1 v1(860,1460)
  Bottom Layer w8: v1(710,1995) 710,1920 825,1805 825,1495 v1(860,1460)
CHLED1: LED3.2 U1.19 | length 2386
  Top Layer w8: U1.19 795,1588.45 v1(795,1535) ; LED3.2 1955,2789.05 v1(1955,2705)
  Bottom Layer w8: v1(795,1535) 795,1485 870,1410 920,1410 935,1425 935,1900 1105,2070 1415,2070 1955,2610 v1(1955,2705)
CHLED2: LED4.2 U1.18 | length 2089.2
  Top Layer w8: U1.18 760,1595.61 v1(760,1480) ; v1(1950,2035) 1950,2112.54 LED4.2
  Bottom Layer w8: v1(760,1480) 844,1396 925.8,1396 949,1419.2 949,1894.2 1109.9,2055.1 1929.9,2055.1 v1(1950,2035)
CHLED3: LED5.2 U1.17 | length 1536.8
  Top Layer w8: U1.17 730,1597.77 v1(730,1530) ; LED5.2 1955,1442.25 v1(1955,1380)
  Bottom Layer w8: v1(730,1530) 730,1470 818,1382 1443.88,1382 1445.88,1380 v1(1955,1380)
CHLED4: LED6.2 U1.16 | length 1896.2
  Top Layer w8: U1.16 657.25,1642.18 685,1614.43 v1(685,1565) ; v1(1950,845) 1950,773.84 LED6.2
  Bottom Layer w8: v1(685,1565) 685,1395 810,1270 1055,1270 1135,1190 1720,1190 1950,960 v1(1950,845)
CHLED5: LED7.2 U1.15 | length 2508
  Top Layer w8: U1.15 643.33,1628.26 665,1606.59 665,1395.69 655,1385.69 v1(655,1385) ; LED7.2 1955.44,95 v1(2025,95)
  Bottom Layer w8: v1(655,1385) 880,1160 920,1160 1050,1030 1050,920 1220,750 1495,750 1565,680 1565,320 1790,95 v1(2025,95)
CS1: U1.31 U7.6 | length 1235.8
  Top Layer w8: U1.31 831.55,2055 1075,2055 1095,2075 1095,2325 1239.94,2469.94 1239.94,2484.94 v1(1240,2485) ; U7.6 v1(1270,2695)
  Bottom Layer w8: v1(1240,2485) 1240,2665 v1(1270,2695)
CS2: U1.30 U6.6 | length 765.7
  Top Layer w8: U1.30 839.39,2035 1090,2035 1115,2060 1115,2245 1128.75,2258.75 U6.6
CS3: U1.22 U5.6 | length 534.6
  Top Layer w10: U1.22 776.96,1690 1000,1690 1132.5,1822.5 U5.6
CS4: U1.21 U4.6 | length 614.2
  Top Layer w8: U1.21 1054.12,1385 U4.6@1205.51,1385
CS5: U1.20 U3.6 | length 1023.2
  Top Layer w8: U1.20 1080,1331.29 1080,954.69 1084.69,950 U3.6
GND: C1.1 C2.1 C3.2 C4.2 C5.2 C6.2 C7.2 C8.2 C9.2 C10.2 C11.2 C12.2 C14.2 C15.2 C16.2 C17.2 C18.2 J1.3 J1.5 J1.9 P1.4 P2.1 P2.3 P2.5 P2.7 R2.2 R3.1 R4.1 R6.2 R7.2 R8.2 R9.2 R10.2 U1.8 U1.23 U1.35 U1.47 U2.2 U2.8 U3.1 U4.1 U5.1 U6.1 U7.1 U8.4 | length 4498.1
  Top Layer w8: U3.1@1360,850 v1(1324.53,850) 1324.53,850.17 1340,865.64 v1(1340,1066.9) C5.2 ; U4.1@1360,1285 v1(1324.53,1285) 1324.53,1285.17 1340,1300.64 v1(1340,1505) C6.2 ; U5.1@1360,1725 v1(1324.53,1725) 1324.53,1725.17 1340,1740.64 v1(1340,1940) C7.2 ; U6.1@1360,2160 v1(1324.53,2160) 1324.53,2160.17 1340,2175.64 v1(1340,2380) C8.2 ; C9.2 v1(1340,2815) 1340,2813.89 1325,2798.89 v1(1325,2595) U7.1
  Top Layer w10: C1.1 115,1325.21 v1(115,1280) ; R2.2 128.49,1880 195.94,1880 C12.2 C12.2@220.94,1905 ; v1(205,1215) C2.1 ; J1.3 245,2259.07 v1(245,2054.18) ; v1(285,1905) 339.25,1905 U1.47 U1.47@405.31,1839.05 ; U1.8 488.94,1656.6 532.34,1700 v1(535,1700) ; v1(530.4,1414.6) 531.01,1413.99 531.01,1360.33 U8.4 ; v1(589.31,1909.06) 591.23,1910.98 591.23,1926.03 U1.35 695,2029.8 v1(695,2065) 695,2130.88 C11.2 ; P2.1 P2.3 P2.5 P2.7 1056.82,2406.82 v1(1090,2440) ; U1.23 784.8,1710 845,1710 v1(875,1740) ; v1(810,1350) U2.2 ; v1(860,1250) U2.8 942.17,1196.65 C3.2 ; v1(1060,765) R9.2 ; R6.2 1500,2471.78 v1(1500,2520) ; v1(1595,95) R10.2 ; v1(1605,1440) R8.2 ; v1(1650,2160) 1650,2115.39 R7.2
  Top Layer w20: C12.2@220.94,1905 v1(285,1905) ; v1(285,830) C16.2 C18.2 C17.2 C15.2 v1(285,1135) ; v1(285,935) C18.2@336.02,935 ; v1(285,1030) C17.2@336.02,1030 ; v1(335.59,1249.41) 336.18,1248.82 C14.2 ; v1(515,2615) R3.1 R4.1 ; v1(875,1140) 875.94,1139.06 C4.2 ; v1(875,1740) 882.6,1747.6 936.65,1747.6 C10.2 ; C3.2 946.18,1195 v1(1005,1195)
  Bottom Layer w10: v1(589.31,1909.06) 590.94,1909.06 v1@595,1905
NetC1_2: C1.2 R1.1 U1.5 X1.1 | length 544.5
  Top Layer w10: C1.2 114.28,1432.09 R1.1 257.93,1575.74 X1.1 261.44,1613.56 305,1570 318.71,1570 U1.5
NetC2_2: C2.2 R1.2 U1.6 X1.2 | length 515.4
  Top Layer w10: C2.2 205,1364.13 R1.2 340.29,1499.43 X1.2 372.07,1502.07 329.49,1544.65 329.49,1552.94 U1.6
NetC13_2: C13.2 U8.5 | length 93.4
  Top Layer w10: C13.2 469.44,1215.56 484.72,1200.28 U8.5
NetLED1_1: LED1.1 R3.2 | length 107
  Top Layer w10: LED1.1 433.98,2610 R3.2
NetLED1_2: LED1.2 U1.11 | length 1147.1
  Top Layer w10: LED1.2 215.94,2608.03 263.98,2560 v1(265,2560) ; U1.11 556,1640.25 556,1759 v1(555,1760)
  Bottom Layer w10: v1(265,2560) 265,2410 309,2366 309,2008.37 555,1762.37 v1(555,1760)
NetLED2_1: LED2.1 R4.2 | length 111.1
  Top Layer w10: LED2.1 423.98,2505 R4.2
NetLED2_2: LED2.2 U1.14 | length 1062
  Top Layer w10: LED2.2 215.94,2503.03 323.98,2395 v1(325,2395) ; v1(600,1755) 600,1644.25 U1.14
  Bottom Layer w10: v1(325,2395) 325,2030 v1(600,1755)
NetLED3_1: LED3.1 R6.1 | length 510.4
  Top Layer w18: R6.1 1547.43,2472.95 1700,2625.52 1700,2775 1715,2790 LED3.1
NetLED4_1: LED4.1 R7.1 | length 137
  Top Layer w10: R7.1 1834.35,2115 LED4.1
NetLED5_1: LED5.1 R8.1 | length 117.7
  Top Layer w10: R8.1 1832.75,1440 LED5.1
NetLED6_1: LED6.1 R9.1 | length 658.3
  Top Layer w10: R9.1 v1(1550,765) ; v1(1770,765) 1831.16,765 LED6.1
  Bottom Layer w10: v1(1550,765) v1(1770,765)
NetLED7_1: LED7.1 R10.1 | length 141.9
  Top Layer w10: R10.1 1834.56,95 LED7.1
NetR2_1: R2.1 U1.44 | length 373.3
  Top Layer w10: R2.1 167.31,1970 357.77,1970 397.04,1930.73 U1.44
NetR5_1: R5.1 U1.7 | length 485.1
  Top Layer w8: R5.1 129.28,1754.41 148.69,1735 v1(315,1735) ; U1.7 500,1695.61 500,1749.31 490,1759.31 v1(490,1760)
  Bottom Layer w8: v1(315,1735) 465,1735 v1(490,1760)
NetTHERM1_1: THERM1.1 U7.3 | length 819.9
  Top Layer w18: U7.3 1490,2695 1720,2925 1720,3211.02 THERM1.1
NetTHERM1_2: THERM1.2 U7.2 | length 553.1
  Top Layer w18: U7.2 1480,2645 1675,2840 1800,2965 THERM1.2
NetTHERM2_1: THERM2.1 U6.3 | length 570.4
  Top Layer w18: U6.3 1473.75,2258.75 1788.14,2573.14 1788.14,2602.91 THERM2.1
NetTHERM2_2: THERM2.2 U6.2 | length 444.9
  Top Layer w18: U6.2 1528.75,2208.75 1623.75,2303.75 THERM2.2
NetTHERM3_1: 23.1 U5.3 | length 453.6
  Top Layer w18: U5.3 1662.5,1822.5 1759.89,1919.89 1764.59,1919.89 1783.22,1938.52 23.1
NetTHERM3_2: 23.2 U5.2 | length 465.6
  Top Layer w18: U5.2 1655,1772.5 23.2
NetTHERM4_1: THERM4.1 U4.3 | length 456.9
  Top Layer w18: U4.3 1676.02,1386.25 THERM4.1
NetTHERM4_2: THERM4.2 U4.2 | length 672.6
  Top Layer w18: U4.2 1598.75,1336.25 1795,1140 1795,956.25 THERM4.2
NetTHERM5_1: THERM5.1 U3.3 | length 608.4
  Top Layer w18: U3.3 1395.56,948.92 1526.08,948.92 1800,675 THERM5.1
NetTHERM5_2: THERM5.2 U3.2 | length 845.7
  Top Layer w18: U3.2 1484.46,900 1715,669.46 1715,360 THERM5.2
SPICLK: P2.8 U1.26 U3.5 U4.5 U5.5 U6.5 U7.5 | length 3640.2
  Top Layer w8: U1.26 905.75,1990 v1(1225,1990) ; P2.8 995,2284.31 1010.69,2300 1051.75,2300 1056.75,2305 v1(1060,2305) ; v1(1115,1000) U3.5 ; v1(1119.43,1436.25) U4.5 ; v1(1125,1875) 1126.25,1873.75 1204.26,1873.75 U5.5 ; v1(1125.36,2307.11) 1127,2308.75 U6.5 ; U7.5 1290,2745 1295,2740 v1@1295,2310 ; v1(1295,1000) v1(1295,1435) v1@1295,1875 ; v1(1296.56,1875) v1@1295,1875 ; v1(1296.88,2310) v1@1295,2310 ; v1@1295,1875 v1(1295,1990) v1@1295,2310
  Bottom Layer w8: v1(1060,2305) 1061.05,2306.05 1124.3,2306.05 v1(1125.36,2307.11) 1126.8,2308.55 1295.43,2308.55 v1(1296.88,2310) ; v1(1115,1000) v1(1295,1000) ; v1(1119.43,1436.25) 1120.05,1435.62 1294.38,1435.62 v1(1295,1435) ; v1(1125,1875) v1(1296.56,1875) ; v1(1225,1990) v1(1295,1990)
SPIMISO: P2.6 U1.27 U3.7 U4.7 U5.7 U6.7 U7.7 | length 3081.4
  Top Layer w8: U1.27 902.91,2015 1270,2015 ; P2.6 910.69,2245.47 910.69,2214.32 945,2180 v1(1060,2180) ; U3.7 1237.01,900 1270,932.99 1270,1335 ; U4.7 1268.75,1336.25 1270,1335 ; U5.7 1267.5,1772.5 1270,1770 ; U6.7 v1(1268.75,2208.75) v1@1270,2210 ; U7.7 1265.31,2645 1270,2640.31 v1@1270,2210 ; 1270,1335 1270,1770 ; 1270,1770 1270,2015 ; 1270,2015 v1@1270,2210
  Bottom Layer w8: v1(1060,2180) 1088.75,2208.75 v1(1268.75,2208.75)
SWCLK: J1.4 U1.37 | length 373.9
  Top Layer w8: J1.4 407.42,2256.88 467.35,2256.88 505,2219.24 505,2017.64 U1.37
SWDIO: J1.2 U1.34 | length 733.6
  Top Layer w10: J1.2 405.53,2309.59 499.59,2309.59 v1(500,2310) ; v1(512.35,1872.35) 514.7,1870 515,1870 535.29,1849.71 565.93,1849.71 610.31,1894.1 610.31,1917.28 U1.34
  Bottom Layer w10: v1(500,2310) 512.35,2297.65 v1(512.35,1872.35)
SWO: J1.6 U1.39 | length 346.2
  Top Layer w8: J1.6 475.31,2209.18 486.61,2197.89 486.61,1980.36 U1.39
UART_TX: P2.4 U1.12 | length 820.3
  Top Layer w8: U1.12@539.89,1596.31 575,1631.41 575,1795 v1(605,1825) ; v1(795,2180) P2.4
  Bottom Layer w8: v1(605,1825) 605,1893.79 660,1948.79 660,2130 710,2180 v1(795,2180)
pads on no net: J1.8 J1.10 P2.MH1 P2.MH2 U1.2 U1.3 U1.4 U1.10 U1.13 U1.25 U1.28 U1.29 U1.38 U1.40 U1.41 U1.42 U1.43 U1.45 U1.46 U2.5 U3.8 U4.8 U5.8 U6.8 U7.8

## Polygon pours and split planes (outlines as drawn)
+12 on Top Layer "+12_L01_P000" (solid, pour order 0): 440,760 685,760 685,1100 625,1160 625,1235 545,1235 545,1140 440,1140
GND on GND (split plane): 181 vertices, not listed, extent 35.03,30.03 2089.96,3354.96
3V3 on 3V3 (split plane): 181 vertices, not listed, extent 35.03,30.03 2089.96,3354.96

## Silkscreen, mask and mechanical layers (free items; w line width, h text height)
Top Overlay:
  text "BRONCO / RACING" at 215,2715 h110.24
  text "PWR" at 45,2590 h70
  text "TX" at 45,2490 h70
Bottom Overlay:
  text "+3v3" at 675.66,2650 h60 r270
  text "UART TX" at 770.66,2650 h60 r270
  text "SPI MISO" at 865.66,2650 h60 r270
  text "SPI CLK" at 970.66,2650 h60 r270
  text "+12" at 645,940 h60 r270
  text "CANH" at 725.66,940 h60 r270
  text "CANL" at 805.66,940 h60 r270
  text "GND" at 885.66,940 h60 r270
  text "Thermocouple to party bus V2" at 1960,155 h118.11 r270

## Text inside footprints (layer, text, board x,y; h text height)
23: Top Overlay "-" at 1600,1648.52 h200 r270; Top Overlay "+" at 1585,1978.52 h200 r270
P2: Top Overlay "7" at 1060.35,2423.36 h40 r180; Top Overlay "8" at 1060.35,2277.69 h40 r180; Top Overlay "1" at 653.27,2423.36 h40 r180; Top Overlay "2" at 653.27,2277.69 h40 r180
THERM1: Top Overlay "-" at 1600,3001.02 h200 r270; Top Overlay "+" at 1585,3331.02 h200 r270
THERM2: Top Overlay "-" at 1600,2324.77 h200 r270; Top Overlay "+" at 1585,2654.77 h200 r270
THERM4: Top Overlay "-" at 1600,972.27 h200 r270; Top Overlay "+" at 1585,1302.27 h200 r270
THERM5: Top Overlay "-" at 1600,296.02 h200 r270; Top Overlay "+" at 1585,626.02 h200 r270